# Altium PCB Mach3_v2.PcbDoc
Units mm, origin at the board's own origin, x right, y up, seen from the top; angles counter-clockwise.
Board outline 90 x 24.9 mm, 2 copper layers (Top Layer, Bottom Layer); 29 components, 16 nets, 131 pads, 11 vias.
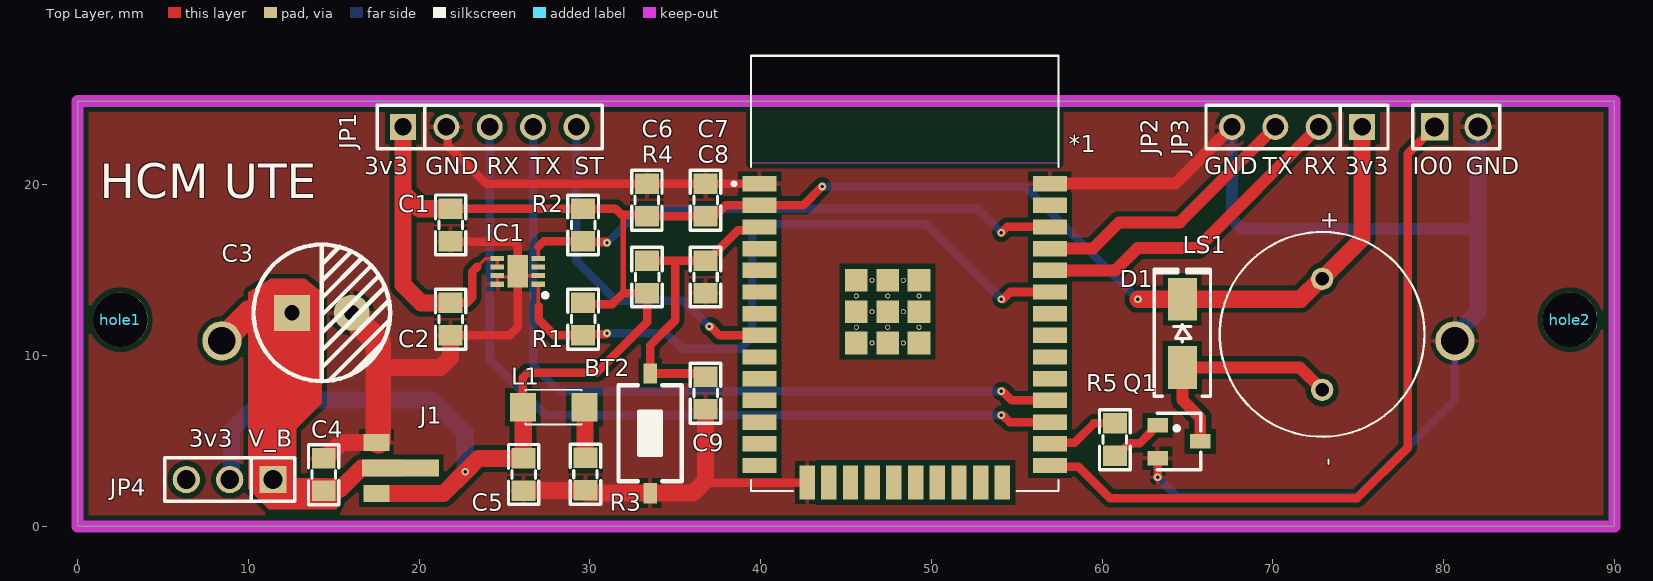
[diagram p0: Top Layer view]
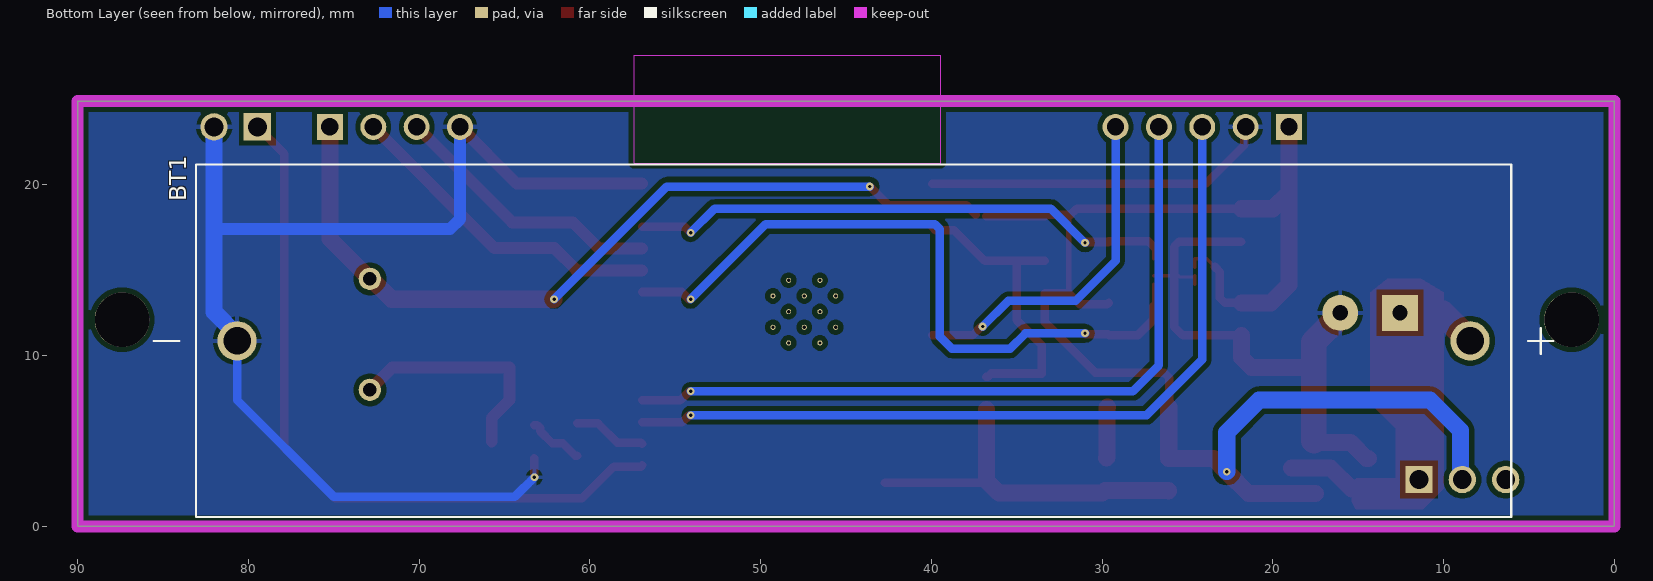
[diagram p1: Bottom Layer view, seen from below]
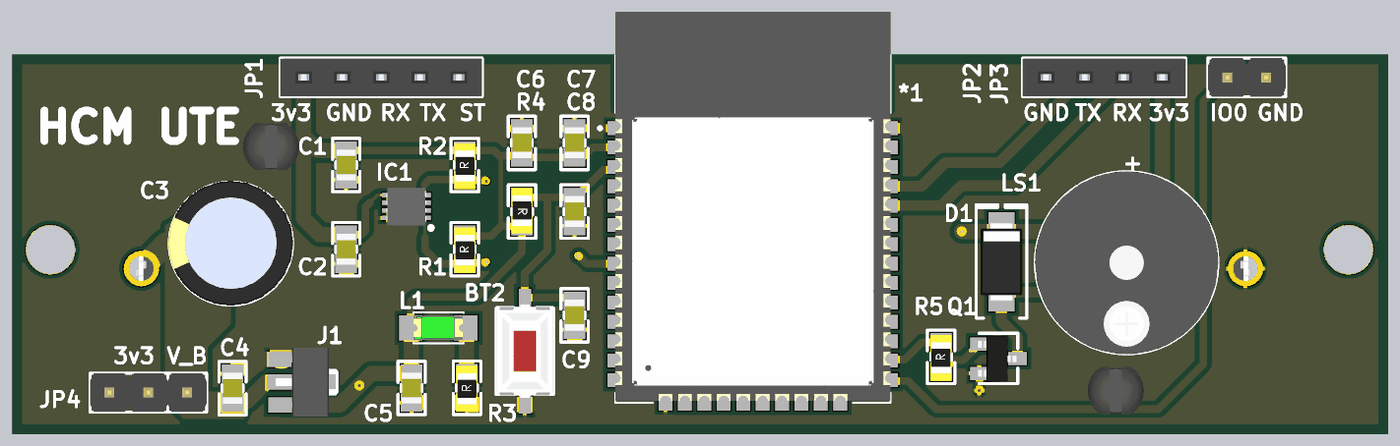
[diagram p2: 3D render of the assembled board from above, using the file's embedded part models]

## Layer stack, top to bottom
Top Solder: solder mask 0.0102, Solder Resist, Dk 3.5
Top Layer: signal copper 0.0356
Dielectric 1: dielectric 0.32, FR-4, Dk 4.8
Bottom Layer: signal copper 0.0356
Bottom Solder: solder mask 0.0102, Solder Resist, Dk 3.5

## Board outline
0,0 90,0 90,24.9 0,24.9

## Design rules (kind name [scope] priority, off if disabled: settings)
Clearance [All] p1: gap=0.3 ignorepadtopadclearanceinfootprint=FALSE
PolygonConnect [All] p1: connectstyle=Relief reliefconductorwidth=0.254 reliefentries=4 polygonreliefangle="90 Angle" airgapwidth=0.254
RoutingVias RoutingVias_1 [All] p1: holewidth=0.711 width=1.27 viastyle="Through Hole" minholewidth=0.711 minwidth=1.27 maxholewidth=0.711 maxwidth=1.27
RoutingVias [All] p2: holewidth=0.5 width=0.8 viastyle="Through Hole" minholewidth=0.2 minwidth=0.45 maxholewidth=0.8 maxwidth=1.3
SolderMaskExpansion [All] p1: expansion=0.102 istentingtop=FALSE
Width [All] p1: maxlimit=1.5 minlimit=0.15 preferedwidth=0.3
30 further rules are at their usual default settings.

## Components (designator, comment, footprint, x,y, rotation, side; value= is the part's Value field where it differs from the comment)
*1 "ESP32 WROOM 32" ESP32-WROOM-32D 48.442,14.812 r0 top
BT1 "1043" BAT_1043 44.555,10.86 r180 bottom
BT2 "Nut Nhan 2 Chan SMD 3x6x2.5" "Nut Nhan 2 Chan SMD 3x6x2.5" 33.528,5.449 r90 top
C1 "4.7uF" "tu 0805" 21.845,17.652 r270 top
C2 "104" "tu 0805" 21.845,12.134 r270 top
C3 "10uF" "tu hoa 8mm" 14.3,12.5 r0 top
C4 "1uf" "tu 0805" 14.408,3.022 r90 top
C5 "1uf" "tu 0805" 26.12,3.037 r270 top
C6 "22uf" "tu 0805" 33.333,19.1 r90 top
C7 "104" "tu 0805" 36.777,19.1 r90 top
C8 "104" "tu 0805" 36.777,14.601 r270 top
C9 "104" "tu 0805" 36.777,7.798 r90 top
D1 "M7" "DIODE SMA" 64.7,11.3 r90 top
hole1 "Vit 3mm" "Screw 3.0" 2.5,12.1 r90 top
hole2 "Vit 3mm" "Screw 3.0" 87.4,12.1 r90 top
IC1 "" SON50P250X250X100-9N-D 25.782,14.928 r180 top
J1 "MCP1700T-3302E/MB" MCP1700T-3302E/MB 19.5,3.42 r270 top
JP1 "JP 1x5 2.54" "JP 1x5 CT" 19.053,23.394 r0 top
JP2 "JP 1x4 2.54" "JP 1x4 CT" 75.228,23.394 r180 top
JP3 "JP 1x2 2.54" "JP 1x2 DT" 79.477,23.394 r0 top
JP4 "JP 1x3 2.54" "JP 1x3 DT" 11.44,2.736 r180 top
L1 "LED 0805" LED-1206-Green 26.072,6.976 r0 top
LS1 "CCG-1206" CUI_CCG-1206 72.888,11.242 r270 top
Q1 "BC817" SOT-23 64.499,4.974 r270 top value=C9014
R1 "10k" "tro smd 0805" 29.539,12.131 r90 top
R2 "10k" "tro smd 0805" 29.539,17.649 r90 top
R3 "1k" "tro smd 0805" 29.679,3.046 r90 top
R4 "10k" "tro smd 0805" 33.409,14.598 r270 top
R5 "1k" "tro smd 0805" 60.688,5.071 r90 top

## Footprints (in the part's own frame and the unit in brackets; to place one, negate y for a bottom-side part, rotate by r counter-clockwise, add the part's x,y. Pads: shape width x height; smd on the part's side, far side on the other; paste and mask are expansions set on the pad)
BAT_1043 [mm]
  round 2.3 hole 1.6: N(-36.11,0) P(36.11,0)
  round 0 all layers, no hole: ""(-27.29,-7.87) ""(27.91,7.87)
  round 0 on Bottom Solder: ""(36.11,-7.87)
  silkscreen extent -41,-10.33 41,10.33, body extent -38.53,-10.33 38.53,10.33, height 14.86
CUI_CCG-1206 [mm]
  round 1.308 hole 0.8: M(3.25,0) P(-3.25,0)
  silkscreen extent -6,-6 6,6, body extent -6,-6 6,6, height 10
"DIODE SMA" [mm] "SMA"
  rect 2.5x1.7 smd: 1(-2,0) 2(2,0)
  silkscreen extent -3.68,-1.65 3.75,1.65, body extent -2.6,-1.37 2.6,1.37, height 2.4
ESP32-WROOM-32D [mm]
  rect 2x0.9 smd: 1(-8.5,5.26) 2(-8.5,3.99) 3(-8.5,2.72) 4(-8.5,1.45) 5(-8.5,0.18) 6(-8.5,-1.09) 7(-8.5,-2.36) 8(-8.5,-3.63) 9(-8.5,-4.9) 10(-8.5,-6.17) 11(-8.5,-7.44) 12(-8.5,-8.71) 13(-8.5,-9.98) 14(-8.5,-11.25) 25(8.5,-11.25) 26(8.5,-9.98) 27(8.5,-8.71) 28(8.5,-7.44) 29(8.5,-6.17) 30(8.5,-4.9) 31(8.5,-3.63) 32(8.5,-2.36) 33(8.5,-1.09) 34(8.5,0.18) 35(8.5,1.45) 36(8.5,2.72) 37(8.5,3.99) 38(8.5,5.26)
  rect 0.9x2 smd: 15(-5.715,-12.25) 16(-4.445,-12.25) 17(-3.175,-12.25) 18(-1.905,-12.25) 19(-0.635,-12.25) 20(0.635,-12.25) 21(1.905,-12.25) 22(3.175,-12.25) 23(4.445,-12.25) 24(5.715,-12.25)
  rect 1.33x1.33 smd: 39(-2.835,-4.075) 39(-2.835,-2.24) 39(-2.835,-0.405) 39(-1,-4.075) 39(-1,-2.24) 39(-1,-0.405) 39(0.835,-4.075) 39(0.835,-2.24) 39(0.835,-0.405)
  round 0.3 hole 0.2: 39(-2.835,-3.157) 39(-2.835,-1.322) 39(-1.917,-4.075) 39(-1.917,-2.24) 39(-1.917,-0.405) 39(-1,-3.157) 39(-1,-1.322) 39(-0.082,-4.075) 39(-0.082,-2.24) 39(-0.082,-0.405) 39(0.835,-3.157) 39(0.835,-1.322)
  Keep-Out Layer region: 9,6.45 -9,6.45 -9,12.75 9,12.75
  Keep-Out Layer region: 9,6.45 -9,6.45 -9,12.75 9,12.75
  silkscreen extent -10.1,-12.75 9,12.75, body extent -9,-12.62 9,12.88, height 3.2
"JP 1x2 DT" [mm] "2 pins, 1 row, straight, gold plating"
  rect 1.6x1.6 hole 1.1: 1(0,0)
  round 1.6 hole 1.1: 2(2.54,0)
  silkscreen extent -1.27,-1.27 3.81,1.27, body extent -1.27,-1.27 3.81,1.27, height 8.54
"JP 1x3 DT" [mm]
  rect 1.6x1.6 hole 1.1: 1(0,0)
  round 1.6 hole 1.1: 2(2.54,0) 3(5.08,0)
  silkscreen extent -1.27,-1.27 6.35,1.27, body extent -1.27,-1.27 6.35,1.27, height 8.54
"JP 1x4 CT" [mm]
  rect 1.52x1.52 hole 1.02: 1(0,0)
  round 1.52 hole 1.02: 2(2.54,0) 3(5.08,0) 4(7.62,0)
  silkscreen extent -1.52,-1.27 9.14,1.27, body extent -1.52,-1.25 9.14,1.25, height 8.51
"JP 1x5 CT" [mm]
  rect 1.52x1.52 hole 1.02: 1(0,0)
  round 1.52 hole 1.02: 2(2.54,0) 3(5.08,0) 4(7.62,0) 5(10.16,0)
  silkscreen extent -1.52,-1.27 11.68,1.27, body extent -1.52,-1.25 11.68,1.25, height 8.51
LED-1206-Green [mil]
  rect 60x65 smd: 1(0,0) 2(142,0)
  silkscreen extent 6,-40 136,40, body extent 7,-31 133,32, height 43
MCP1700T-3302E/MB [mm]
  rect 1x1.5 smd: 1(-1.5,-2) 3(1.5,-2)
  rect 1x4.5 smd: 2(0,-0.6)
  body extent -2.25,-2.27 2.25,1.83, height 1.2
"Nut Nhan 2 Chan SMD 3x6x2.5" [mm] "Switch SMD type"
  rect 1.2x0.8 smd: 1(-3.5,0) 2(3.5,0)
  silkscreen extent -2.82,-1.85 2.82,1.85, body extent -3.05,-1.85 3.05,1.85, height 2.5
"Screw 3.0" [mm] "Hole 3.2mm outline 8mm"
  round 3.2 hole 3.2 mask+0.1: 1(0,0)
SON50P250X250X100-9N-D [mm]
  rect 0.8x0.3 smd: 1(-1.2,0.75) 2(-1.2,0.25) 3(-1.2,-0.25) 4(-1.2,-0.75) 5(1.2,-0.75) 6(1.2,-0.25) 7(1.2,0.25) 8(1.2,0.75)
  rect 1.2x1.9 smd: 9(0,0)
  silkscreen extent -1.73,1.28 -1.48,1.52, body extent -1.3,-1.25 1.3,1.25, height 1
SOT-23 [mm] "SOT 23 _ 1-3-2"
  rect 0.85x1.2 smd: 1(-0.94,-1.245) 2(0.985,-1.25) 3(0.005,1.25)
  silkscreen extent -1.65,-1.27 1.65,1.27, body extent -1.47,-1.33 1.53,1.17, height 1.06
"tro smd 0805" [mm]
  rect 1.2x1.4 smd: 1(-0.946,-0.061) 2(0.954,-0.061)
  silkscreen extent -1.75,-0.97 1.75,0.84, body extent -1.56,-0.76 1.44,0.64, height 0.53
"tu 0805" [mm] "Compoment SMD 80x50mil"
  rect 1.2x1.4 smd: 1(-0.946,-0.003) 2(0.954,-0.003)
  silkscreen extent -1.75,-0.89 1.75,0.89, body extent -1.01,-0.64 1.01,0.63, height 0.61
"tu hoa 8mm" [mm]
  rect 2.1x2.1 hole 0.9: 1(-1.75,0)
  round 2.1 hole 0.9: 2(1.75,0)
  silkscreen extent -4,-4 4,4, body extent -4.1,-4.07 4.1,4.13, height 13.81

## Part data
BT1: "THM Holder for 18650 Battery", Package="NON STANDARD-5 Keystone", Check_prices=https://www.snapeda.com/parts/1043/Keystone/view-part/?ref=eda, MF="Keystone Electronics", MP=1043, SnapEDA_Link=https://www.snapeda.com/parts/1043/Keystone/view-part/?ref=snap
C1 C2 C4 C5 C6 C7 C8 C9: library part "Tu 0805 104 50V 10%", "Dán", Chung_Loai=Dán, Don_Vi=Con, Ma_Hang=MH004551, So_Chan=2, Ten_Linh_Kien="Tụ 0805 104-100nF 10% 50V"
C3: library part "Tu Hoa 0.1uF 50V 5x11", "Cắm", Chung_Loai=Cắm, Don_Vi=Con, Ma_Hang=MH006853, So_Chan=2, Ten_Linh_Kien="Tụ Hóa 0.1uF 50V"
D1: library part "Diode M7 ( 4007 )", "Dán", Chung_Loai=Dán, Don_Vi=Con, Ma_Hang=MH000944, Ten_Linh_Kien="Diode M7 1N4007 SMD 1A 1000V"
IC1: library part SHT30-DIS-B10KS_1, "Integrated Circuit", Arrow Part Number=SHT30-DIS-B10KS, Manufacturer_Name=Sensirion, Mouser Part Number=403-SHT30-DIS-B10KS, Arrow Price/Stock=https://www.arrow.com/en/products/sht30-dis-b10ks/sensirion-ag?utm_currency=USD&region=nac, Datasheet Link=https://datasheet.lcsc.com/lcsc/2106070104_Sensirion-SHT30-DIS-B10KS_C2687423.pdf, Height=1mm, Manufacturer_Part_Number=SHT30-DIS-B10KS, Mouser Price/Stock=https://www.mouser.co.uk/ProductDetail/Sensirion/SHT30-DIS-B10kS?qs=MLItCLRbWsxrR5sxpa2%2FcQ%3D%3D
J1: "Linear Voltage Regulator IC Positive Fixed 1 Output 250mA SOT-89-3", Package="SOT-89 Microchip", Availability="In Stock", Check_prices=https://www.snapeda.com/parts/MCP1700T-3302E/MB/Microchip/view-part/?ref=eda, MF=Microchip, MP=MCP1700T-3302E/MB, Price=None, Purchase-URL=https://pricing.snapeda.com/search/part/MCP1700T-3302E/MB/?ref=eda, SnapEDA_Link=https://www.snapeda.com/parts/MCP1700T-3302E/MB/Microchip/view-part/?ref=snap
JP1: library part "JP 1x5 2.54 Cai Thang", "Cắm", Chung_Loai=Cắm, Don_Vi=Con, Ma_Hang=MH004006, Ten_Linh_Kien="Jump Đơn Cái 2.54MM 1x20P Thẳng"
JP2: library part "JP 1x4 2.54 Cai Thang", "Cắm", Chung_Loai=Cắm, Don_Vi=Con, Ma_Hang=MH004006, Ten_Linh_Kien="Jump Đơn Cái 2.54MM 1x20P Thẳng"
JP3: library part "JP 1x2 2.54 Duc Thang", "Cắm", Chung_Loai=Cắm, Don_Vi=Con, Ma_Hang=MH000903, Ten_Linh_Kien="Jump Đơn Đực 2.54MM 1x40P Thẳng 11MM"
JP4: library part "JP 1x3 2.54 Duc Thang", "Cắm", Chung_Loai=Cắm, Don_Vi=Con, Ma_Hang=MH000903, Ten_Linh_Kien="Jump Đơn Đực 2.54MM 1x40P Thẳng 11MM"
L1: library part "LED 1206 Xanh La", "Dán", Chung_Loai=Dán, Don_Vi=Con, Ma_Hang=MH002947, Ten_Linh_Kien="LED1206 Màu Xanh Lá (Green)"
LS1: "12 mm, 5 V, 85 dB, Through Hole, Sealed, Magnetic Audio Transducer Buzzer", Package=None, Check_prices=https://www.snapeda.com/parts/CCG-1206/Same+Sky/view-part/?ref=eda, MF="Same Sky", MP=CCG-1206, SnapEDA_Link=https://www.snapeda.com/parts/CCG-1206/Same+Sky/view-part/?ref=snap
Q1: library part "Trans BC817", "SOT-23 - C8658"
R1 R2 R3 R4 R5: library part "Tro 0805 1% 1k", "Dán", Chung_Loai=Dán, Don_Vi=Con, Ma_Hang=MH005468, So_Chan=2, Ten_Linh_Kien="Trở 0805 1% 1k"
BT2: Ma_Hang=MH001036, Ten="Nút Nhấn 2 Chân 3x6x2.5MM SMD"

## Via types
v1: diameter 0.45, hole 0.2, Top Layer to Bottom Layer, 11 vias

## Nets (pads, with @x,y where several pads share a name; then routed paths per layer and width w, separated by ;. In a path a pad name is that pad's centre, name@x,y a point inside that pad or via, vN(x,y) a via of type N, cw(c..) or ccw(c..) an arc to the next point about the centre after c; other vN are vias at no path point)
3V3: *1.2 C1.1 C2.1 C5.1 C6.1 C7.1 D1.2 IC1.5 IC1.6 J1.3 JP1.1 JP2.1 JP4.2 L1.1 LS1.P R1.2 R2.2 R4.2 | length 138.8
  Top Layer w0.2: 23.4,15.2 23.878,15.678 IC1.5 IC1.6
  Top Layer w0.3: 31.95,13.65 31.95,18.254
  Top Layer w0.5: C2.1 22.807,13.08 23.1,13.372 23.1,14.9 23.4,15.2 ; C1.1 21.845,18.6 29.597,18.6 R2.2 31.496,18.604 31.846,18.254 33.236,18.254 C6.1 C7.1 ; L1.1 26.072,8.707 26.365,9 30.4,9 33.348,11.948 R4.2 31.944,13.644 ; R1.2 29.686,13 31.3,13 31.944,13.644 ; 31.95,13.65 31.944,13.644 ; C7.1@37.412,18.254 37.959,18.802 42.502,18.802 v1(43.6,19.9)
  Top Layer w1: J1.3 21.42,1.92 v1(22.7,3.2) 23.483,3.983 C5.1@26.016,3.983 ; JP1.1 19.053,19.547 ; C2.1 20.12,13.08 19.053,14.147 19.053,19.547 ; C1.1 20.003,18.597 19.053,19.547 ; L1.1 26.094,6.954 26.094,4.005 C5.1 ; v1(62.1,13.3) D1.2 71.613,13.3 72.805,14.492 LS1.P 75.228,16.832 JP2.1
  Bottom Layer w0.5: v1(43.6,19.9) 55.5,19.9 v1(62.1,13.3)
  Bottom Layer w1: JP4.2 9.015,2.851 9.015,5.615 10.8,7.4 20.8,7.4 22.7,5.5 v1(22.7,3.2)
buz: *1.26 R5.2 | length 4.3
  Top Layer w0.5: *1.26 57.002,4.892 58.392,4.892 59.525,6.025 R5.2
EN: *1.3 BT2.2 C8.1 C9.2 R4.1 | length 18
  Top Layer w0.5: R4.1 34.149,15.544 ; 34.149,15.545 34.855,15.545 ; C9.2 36.68,8.752 36.484,8.949 BT2.2 33.528,10.597 35,12.069 35,15.4 34.855,15.545 ; *1.3 39.742,17.332 38.659,17.332 36.874,15.547 C8.1 36.772,15.545 34.855,15.545
ESP32_RX: *1.34 JP2.2 | length 19.2
  Top Layer w0.7: *1.34 60.778,14.992 62.086,16.3 65.594,16.3 JP2.2
ESP32_TX: *1.35 JP2.3 | length 16.2
  Top Layer w0.7: *1.35 59.462,16.262 61,17.8 64.554,17.8 JP2.3
GND: *1.1 *1.15 *1.38 BT1.N BT2.1 C1.2 C2.2 C3.2 C4.2 C5.2 C6.2 C7.2 C8.2 C9.1 IC1.2 IC1.7 IC1.8 IC1.9 J1.1 JP1.2 JP2.4 JP3.2 Q1.2 R3.1 | length 144.8
  Top Layer w0.2: IC1.8 IC1.7@24.582,14.6 ; IC1.7 IC1.7@24.582,14.6 ; IC1.9@25.7,14.846 25.454,14.6 IC1.7@24.582,14.6 ; IC1.9 26.032,14.678 IC1.2
  Top Layer w0.5: JP1.2 21.668,23.319 21.668,22.332 23.946,20.054 C6.2 C7.2 36.789,20.063 39.933,20.063 *1.1 ; C2.2 25.28,11.18 25.782,11.682 IC1.9 25.782,16.383 25.489,16.676 C1.2@21.863,16.676 ; 36.78,2.68 36.899,2.562 *1.15 ; v1(63.25,2.875) Q1.2@63.25,3.988
  Top Layer w0.7: *1.38 64.286,20.072 JP2.4
  Top Layer w1: C4.2 14.511,3.977 15.454,4.92 J1.1 ; 17.6,9.3 21.256,9.3 21.842,9.886 C2.2 ; C5.2 26.125,2.091 29.731,2.091 R3.1 29.84,2.1 29.991,1.949 BT2.1 36.049,1.949 36.78,2.68 C9.1
  Top Layer w1.5: C3.2 16.05,12.338 17.6,10.788 17.6,9.3 J1.1@17.6,5.02
  Bottom Layer w0.5: v1(63.25,2.875) 64.4,1.725 75,1.725 80.665,7.39 BT1.N
  Bottom Layer w0.7: JP2.4 67.608,17.992 68.2,17.4 82.017,17.4
  Bottom Layer w1: BT1.N 80.665,11.212 82.017,12.563 82.017,17.4 JP3.2
IO0: *1.25 JP3.1 | length 42.4
  Top Layer w0.5: *1.25 57.004,3.5 58.6,3.5 60.45,1.65 74.95,1.65 77.9,4.6 77.9,21.817 JP3.1
NetD1_1: D1.1 LS1.M Q1.3 | length 13.5
  Top Layer w0.7: Q1.3 65.749,6.351 64.7,7.4 D1.1 71.58,9.3 LS1.M
NetL1_2: L1.2 R3.2 | length 3
  Top Layer w1: L1.2 29.709,6.946 29.709,4.031 R3.2
NetQ1_1: Q1.1 R5.1 | length 3.3
  Top Layer w0.5: R5.1 60.849,4.125 61.599,4.875 62.217,4.875 62.905,5.563 62.905,5.738 63.08,5.913 Q1.1
SCL: *1.36 IC1.4 R2.1 | length 32.4
  Top Layer w0.2: IC1.4 26.982,16.382
  Top Layer w0.5: 26.982,16.382 27.304,16.704 R2.1 29.652,16.652 30.948,16.652 v1(31,16.6) ; v1(54.1,17.2) 54.432,17.532 *1.36
  Bottom Layer w0.5: v1(31,16.6) 33,18.6 52.7,18.6 v1(54.1,17.2)
SDA: *1.33 IC1.1 R1.1 | length 41.4
  Top Layer w0.2: IC1.1 26.982,12.918 27,12.9
  Top Layer w0.5: 27,12.9 27,12.1 27.914,11.186 R1.1 29.657,11.243 30.943,11.243 v1(31,11.3) ; v1@54.2,13.3 54.622,13.722 *1.33
  Bottom Layer w0.5: v1(31,11.3) 34.491,11.3 35.391,10.4 38.8,10.4 39.5,11.1 39.5,17.4 39.8,17.7 49.7,17.7 v1(54.1,13.3)
STATUS: *1.8 JP1.5 | length 20.4
  Top Layer w0.5: v1(37,11.7) 37.081,11.7 37.599,11.182 *1.8
  Bottom Layer w0.5: JP1.5 29.213,15.543 31.556,13.2 35.5,13.2 v1(37,11.7)
UART_RX: *1.27 JP1.3 | length 48
  Top Layer w0.5: v1(54.1,6.5) 54.181,6.5 54.579,6.102 *1.27
  Bottom Layer w0.5: JP1.3 24.133,9.767 27.4,6.5 v1(54.1,6.5)
UART_TX: *1.28 JP1.4 | length 45.1
  Top Layer w0.5: v1(54.1,7.9) 54.181,7.9 54.709,7.372 *1.28
  Bottom Layer w0.5: JP1.4 26.673,9.427 28.2,7.9 v1(54.1,7.9)
V_BATT: BT1.P C3.1 C4.1 J1.2 JP4.1 | length 10.2
  Top Layer w1: C4.1 14.511,2.177 15.376,2.177 16.619,3.42 J1.2
  Top Layer w1.5: BT1.P 10.085,12.5 C3.1 C3.1@12.3,12.25
pads on no net: *1.4 *1.5 *1.6 *1.7 *1.9 *1.10 *1.11 *1.12 *1.13 *1.14 *1.16 *1.17 *1.18 *1.19 *1.20 *1.21 *1.22 *1.23 *1.24 *1.29 *1.30 *1.31 *1.32 *1.37 *1.39 BT1. hole1.1 hole2.1 IC1.3 JP4.3

## Polygon pours and split planes (outlines as drawn)
GND on Top Layer "GND_L01_P000" (solid, remove dead copper, pour order 0): 0,0 0,24.9 90,24.9 90,0
GND on Bottom Layer "GND_L02_P001" (solid, remove dead copper, pour order 1): 0,0 0,24.9 90,24.9 90,0

## Keep-outs
Keep-Out Layer:
  lines w0.7: 0,24.8 0,0 85.5,0 90,0 90,24.9 85.5,24.9 0,24.9

## Other copper
Top Layer:
  region net V_BATT: 15.376,1.451 15.376,2.524 15.1,2.8 12.8,2.8 12.8,5.7 14.3,7.2 14.3,11.7 14.3,13.7 13.3,14.5 11.3,14.5 10,13.7 10,2.2 11.2,1 15.15,1

## Silkscreen, mask and mechanical layers (free items; w line width, h text height)
Top Overlay:
  text "3v3" at 16.786,20.609 h1
  text "GND" at 20.366,20.609 h1
  text "RX" at 23.945,20.609 h1
  text "TX" at 26.525,20.609 h1
  text "ST" at 29.105,20.609 h1
  text "GND" at 65.986,20.609 h1
  text "TX" at 69.396,20.609 h1
  text "RX" at 71.806,20.609 h1
  text "3v3" at 74.216,20.609 h1
  text "IO0" at 78.203,20.609 h1
  text "GND" at 81.302,20.609 h1
  text "HCM UTE" at 1.3,19.2 h2
  text "3v3" at 6.5,4.667 h1
  text "V_B" at 10,4.667 h1

## Text inside footprints (layer, text, board x,y; h text height)
*1: Mechanical 13 "ANTENNA" at 42.442,23.812 h1
LS1: Top Overlay "-" at 72.888,4.017 h1 r270; Top Overlay "+" at 72.888,18.472 h1 r270